# Altium PCB PCB1.PcbDoc
Units mm, origin at the board's own origin, x right, y up, seen from the top; angles counter-clockwise.
Board outline 90 x 105 mm, 2 copper layers (Top Layer, Bottom Layer), stack 0.325 mm thick; 38 components, 87 nets, 480 pads, 41 vias.
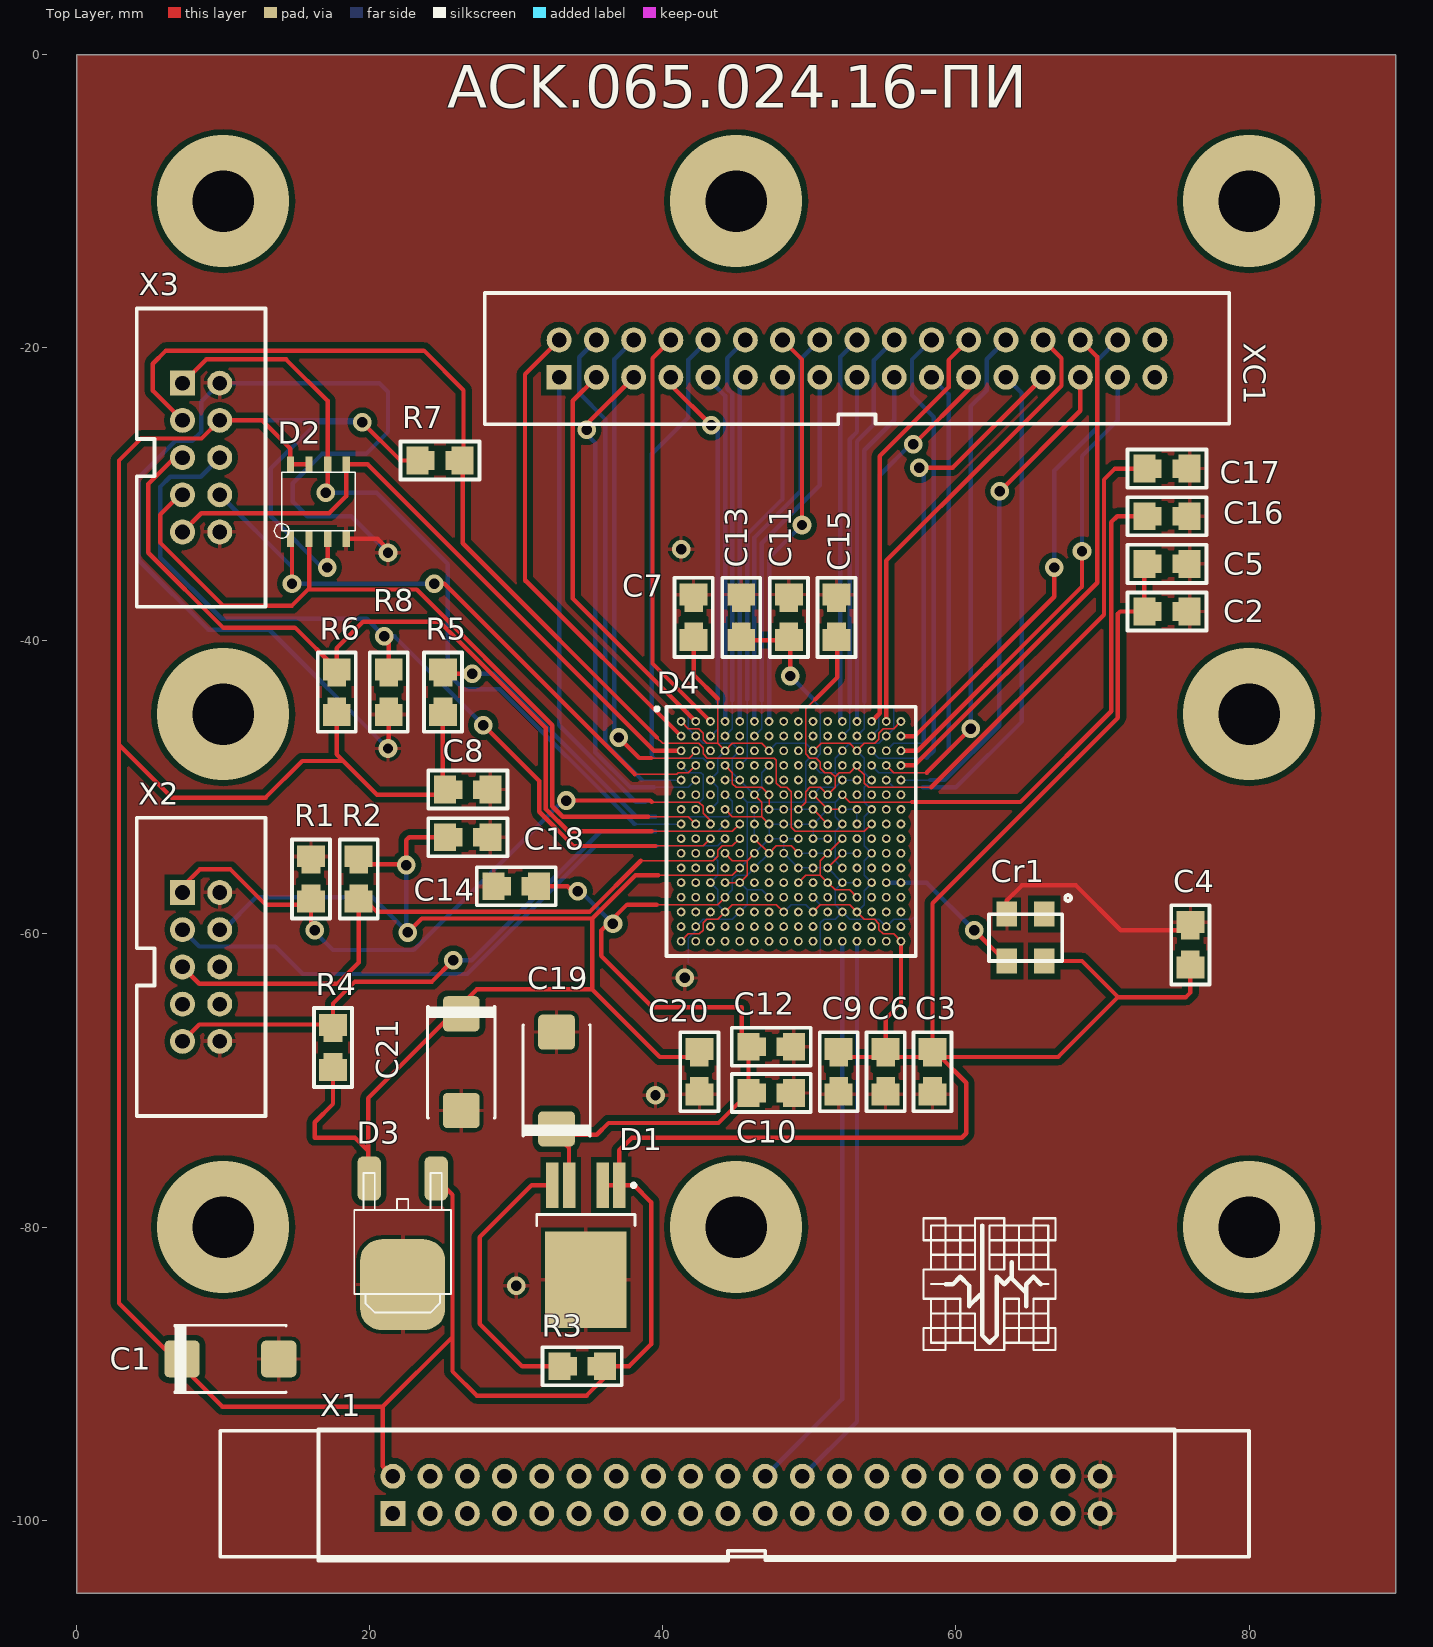
[diagram p0: Top Layer view]
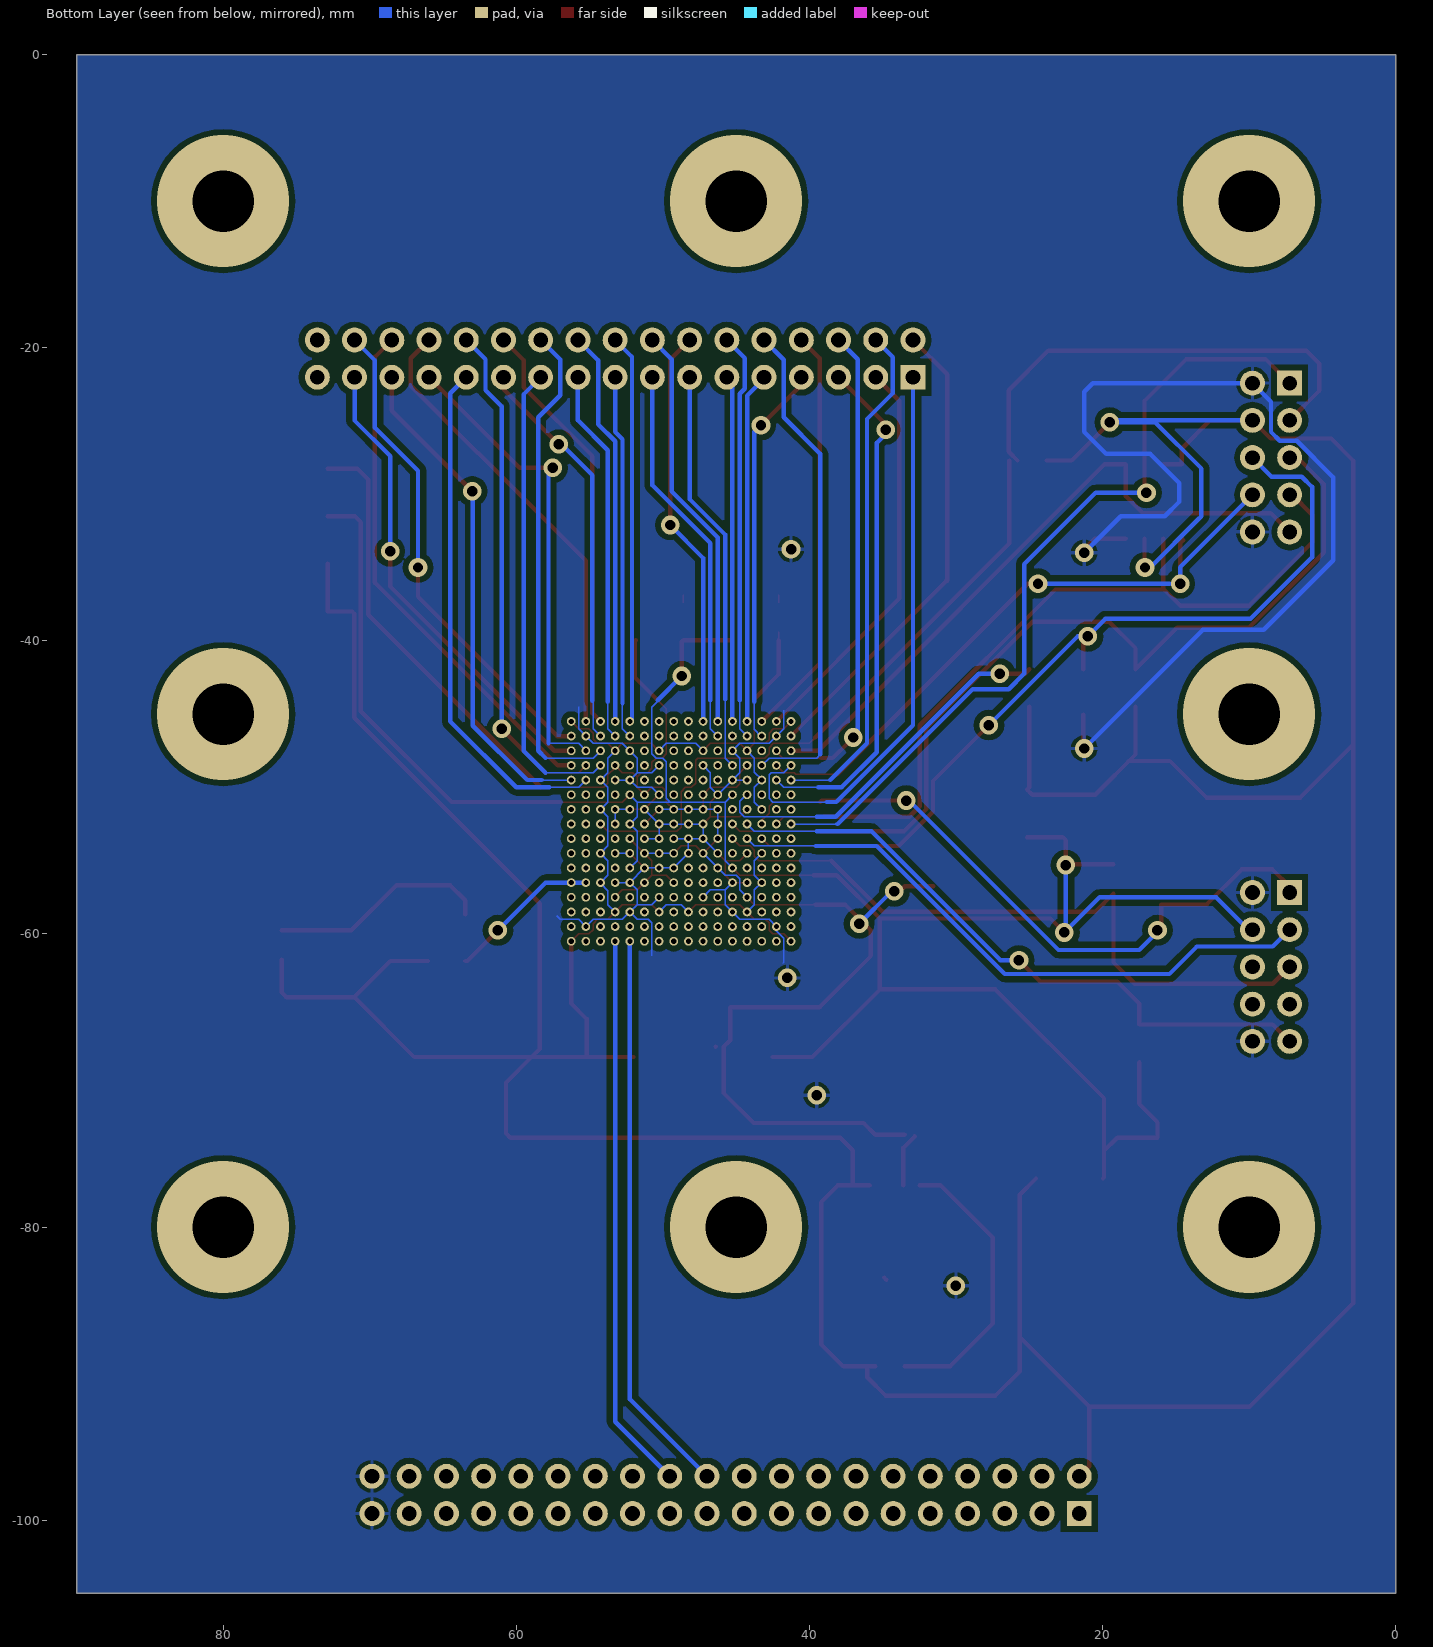
[diagram p1: Bottom Layer view, seen from below]

## Layer stack, top to bottom
Top Solder: solder mask 0.0102, Solder Resist, Dk 3.5
Top Layer: signal copper 0.0356
Dielectric 1: core 0.254, FR-4, Dk 4.2
Bottom Layer: signal copper 0.0356
Bottom Solder: solder mask 0.0102, Solder Resist, Dk 3.5

## Board outline
0,-105 90,-105 90,0 0,0

## Design rules (kind name [scope] priority, off if disabled: settings)
Clearance Clearance_1 [All] p1: gap=0.15 except(0.4: Arc-Poly Track-Poly SMDPad-Poly THPad-Poly Via-Poly Fill-Poly Poly-Poly)
Clearance Clearance_poly [InPolygon] p2: gap=0.44
HoleSize [All] p1: absolutevalues=TRUE maxlimit=5 minlimit=0.025 maxpercent=80.000 minpercent=20.000
MinimumSolderMaskSliver [All] p1 off: minsoldermaskwidth=0.254
PolygonConnect [All] p1: connectstyle=Relief reliefconductorwidth=0.254 reliefentries=4 polygonreliefangle="90 Angle" airgapwidth=0.254
RoutingVias [All] p1: holewidth=0.711 width=1.27 viastyle="Through Hole" minholewidth=0.711 minwidth=1.27 maxholewidth=0.711 maxwidth=1.27
SilkToSilkClearance [All] p1 off: silktosilkclearance=0.254
SolderMaskExpansion [All] p1: expansion=0.102
Width [All] p1: maxlimit=1 minlimit=0.1 preferedwidth=0.3 minimp=50.000000 maximp=50.000000 favimp=50.000000
27 further rules are at their usual default settings.

## Components (designator, comment, footprint, x,y, rotation, side; value= is the part's Value field where it differs from the comment)
C1 "x" "EL Case D (7343-31)" 10.5,-89 r0 top
C2 "10uF" C_0805 74.4,-38 r180 top
C3 "0.1uF" C_0805 58.4,-69.4 r90 top
C4 "0.1uF" C_0805 76,-60.75 r270 top
C5 "10uF" C_0805 74.4,-34.75 r180 top
C6 "1uF" C_0805 55.2,-69.4 r90 top
C7 "10uF" C_0805 42.1,-38.4 r270 top
C8 "10uF" C_0805 26.7,-50.15 r180 top
C9 "10uF" C_0805 52,-69.4 r90 top
C10 "10uF" C_0805 47.4,-70.85 r180 top
C11 "10uF" C_0805 48.6,-38.4 r270 top
C12 "10uF" C_0805 47.4,-67.7 r180 top
C13 "10uF" C_0805 45.35,-38.4 r270 top
C14 "10uF" C_0805 30,-56.75 r0 top
C15 "10uF" C_0805 51.85,-38.4 r270 top
C16 "10uF" C_0805 74.4,-31.5 r180 top
C17 "10uF" C_0805 74.4,-28.25 r180 top
C18 "10uF" C_0805 26.7,-53.4 r180 top
C19 "x" "EL Case D (7343-31)" 32.75,-70 r90 top
C20 "10uF" C_0805 42.5,-69.4 r90 top
C21 "x" "EL Case D (7343-31)" 26.25,-68.75 r270 top
Cr1 "quartz gen 5032" "quartz gen smd 5032" 64.75,-60.25 r180 top
D1 "NCP5661" TO114P990-5_6M 34.75,-81.25 r270 top
D2 "SOIC-8" SOIC-8 16.5,-30.5 r0 top
D3 "LM1117-3.3" TO252AA 22.25,-80.75 r180 top
D4 "Socket_1017-2-0256-0B-01" FBGA256 49.25,-53.5 r0 top
R1 "1 kOm" R_0805 16,-56.25 r270 top
R2 "10 kOm" R_0805 19.25,-56.25 r270 top
R3 "100 kOm" R_0805 34.5,-89.5 r180 top
R4 "10 kOm" R_0805 17.5,-67.75 r90 top
R5 "10 kOm" R_0805 25,-43.5 r270 top
R6 "10 kOm" R_0805 17.75,-43.5 r90 top
R7 "10 kOm" R_0805 24.8,-27.7 r180 top
R8 "10 kOm" R_0805 21.3,-43.5 r90 top
X1 "IDC-40" IDC-40 45.713,-98.275 r90 top
X2 "IDC-10" IDC-10 8.5,-62.25 r0 top
X3 "IDC-10" IDC-10 8.5,-27.5 r0 top
XC1 "IDC-34" IDC-34 53.25,-20.75 r90 top

## Footprints (in the part's own frame and the unit in brackets; to place one, negate y for a bottom-side part, rotate by r counter-clockwise, add the part's x,y. Pads: shape width x height; smd on the part's side, far side on the other; paste and mask are expansions set on the pad)
C_0805 [mm]
  rect 1.5x1.9 smd: 1(-1.55,0) 2(1.55,0)
  rect 1.27x1.27 smd: 1(-1,0) 2(1,0)
  silkscreen extent -2.7,-1.3 2.7,1.3
"EL Case D (7343-31)" [mm] "Capacitor, SM Tantalum; Body 7.3 x 4.3 mm (LxW typ)"
  rrect25% 2.4x2.5 smd: 1(-3.3,0) 2(3.3,0)
  silkscreen extent -3.8,-2.3 3.8,2.3, body extent -3.65,-2.15 3.65,2.15, height 2.81
FBGA256 [mm]
  round 0.6 hole 0.35: A1(-8,8) A2(-7,8) A3(-6,8) A4(-5,8) A5(-4,8) A6(-3,8) A7(-2,8) A8(-1,8) A9(0,8) A10(1,8) A11(2,8) A12(3,8) A13(4,8) A14(5,8) A15(6,8) A16(7,8) B1(-8,7) B2(-7,7) B3(-6,7) B4(-5,7) B5(-4,7) B6(-3,7) B7(-2,7) B8(-1,7) B9(0,7) B10(1,7) B11(2,7) B12(3,7) B13(4,7) B14(5,7) B15(6,7) B16(7,7) C1(-8,6) C2(-7,6) C3(-6,6) C4(-5,6) C5(-4,6) C6(-3,6) C7(-2,6) C8(-1,6) C9(0,6) C10(1,6) C11(2,6) C12(3,6) C13(4,6) C14(5,6) C15(6,6) C16(7,6) D1(-8,5) D2(-7,5) D3(-6,5) D4(-5,5) D5(-4,5) D6(-3,5) D7(-2,5) D8(-1,5) D9(0,5) D10(1,5) D11(2,5) D12(3,5) D13(4,5) D14(5,5) D15(6,5) D16(7,5) E1(-8,4) E2(-7,4) E3(-6,4) E4(-5,4) E5(-4,4) E6(-3,4) E7(-2,4) E8(-1,4) E9(0,4) E10(1,4) E11(2,4) E12(3,4) E13(4,4) E14(5,4) E15(6,4) E16(7,4) F1(-8,3) F2(-7,3) F3(-6,3) F4(-5,3) F5(-4,3) F6(-3,3) F7(-2,3) F8(-1,3) F9(0,3) F10(1,3) F11(2,3) F12(3,3) F13(4,3) F14(5,3) F15(6,3) F16(7,3) G1(-8,2) G2(-7,2) G3(-6,2) G4(-5,2) G5(-4,2) G6(-3,2) G7(-2,2) G8(-1,2) G9(0,2) G10(1,2) G11(2,2) G12(3,2) G13(4,2) G14(5,2) G15(6,2) G16(7,2) H1(-8,1) H2(-7,1) H3(-6,1) H4(-5,1) H5(-4,1) H6(-3,1) H7(-2,1) H8(-1,1) H9(0,1) H10(1,1) H11(2,1) H12(3,1) H13(4,1) H14(5,1) H15(6,1) H16(7,1) J1(-8,0) J2(-7,0) J3(-6,0) J4(-5,0) J5(-4,0) J6(-3,0) J7(-2,0) J8(-1,0) J9(0,0) J10(1,0) J11(2,0) J12(3,0) J13(4,0) J14(5,0) J15(6,0) J16(7,0) K1(-8,-1) K2(-7,-1) K3(-6,-1) K4(-5,-1) K5(-4,-1) K6(-3,-1) K7(-2,-1) K8(-1,-1) K9(0,-1) K10(1,-1) K11(2,-1) K12(3,-1) K13(4,-1) K14(5,-1) K15(6,-1) K16(7,-1) L1(-8,-2) L2(-7,-2) L3(-6,-2) L4(-5,-2) L5(-4,-2) L6(-3,-2) L7(-2,-2) L8(-1,-2) L9(0,-2) L10(1,-2) L11(2,-2) L12(3,-2) L13(4,-2) L14(5,-2) L15(6,-2) L16(7,-2) M1(-8,-3) M2(-7,-3) M3(-6,-3) M4(-5,-3) M5(-4,-3) M6(-3,-3) M7(-2,-3) M8(-1,-3) M9(0,-3) M10(1,-3) M11(2,-3) M12(3,-3) M13(4,-3) M14(5,-3) M15(6,-3) M16(7,-3) N1(-8,-4) N2(-7,-4) N3(-6,-4) N4(-5,-4) N5(-4,-4) N6(-3,-4) N7(-2,-4) N8(-1,-4) N9(0,-4) N10(1,-4) N11(2,-4) N12(3,-4) N13(4,-4) N14(5,-4) N15(6,-4) N16(7,-4) P1(-8,-5) P2(-7,-5) P3(-6,-5) P4(-5,-5) P5(-4,-5) P6(-3,-5) P7(-2,-5) P8(-1,-5) P9(0,-5) P10(1,-5) P11(2,-5) P12(3,-5) P13(4,-5) P14(5,-5) P15(6,-5) P16(7,-5) R1(-8,-6) R2(-7,-6) R3(-6,-6) R4(-5,-6) R5(-4,-6) R6(-3,-6) R7(-2,-6) R8(-1,-6) R9(0,-6) R10(1,-6) R11(2,-6) R12(3,-6) R13(4,-6) R14(5,-6) R15(6,-6) R16(7,-6) T1(-8,-7) T2(-7,-7) T3(-6,-7) T4(-5,-7) T5(-4,-7) T6(-3,-7) T7(-2,-7) T8(-1,-7) T9(0,-7) T10(1,-7) T11(2,-7) T12(3,-7) T13(4,-7) T14(5,-7) T15(6,-7) T16(7,-7)
  silkscreen extent -9.77,-8 8,9, body extent -9,-8 8,9, height 1.55
IDC-10 [mm]
  rect 1.7x1.7 hole 1: 1(-1.27,5.08)
  round 1.7 hole 1: 2(1.27,5.08) 3(-1.27,2.54) 4(1.27,2.54) 5(-1.27,0) 6(1.27,0) 7(-1.27,-2.54) 8(1.27,-2.54) 9(-1.27,-5.08) 10(1.27,-5.08)
  silkscreen extent -4.4,-10.18 4.4,10.17
IDC-34 [mm]
  rect 1.7x1.7 hole 1: 1(-1.27,20.32)
  round 1.7 hole 1: 2(1.27,20.32) 3(-1.27,17.78) 4(1.27,17.78) 5(-1.27,15.24) 6(1.27,15.24) 7(-1.27,12.7) 8(1.27,12.7) 9(-1.27,10.16) 10(1.27,10.16) 11(-1.27,7.62) 12(1.27,7.62) 13(-1.27,5.08) 14(1.27,5.08) 15(-1.27,2.54) 16(1.27,2.54) 17(-1.27,0) 18(1.27,0) 19(-1.27,-2.54) 20(1.27,-2.54) 21(-1.27,-5.08) 22(1.27,-5.08) 23(-1.27,-7.62) 24(1.27,-7.62) 25(-1.27,-10.16) 26(1.27,-10.16) 27(-1.27,-12.7) 28(1.27,-12.7) 29(-1.27,-15.24) 30(1.27,-15.24) 31(-1.27,-17.78) 32(1.27,-17.78) 33(-1.27,-20.32) 34(1.27,-20.32)
  silkscreen extent -4.47,-25.4 4.48,25.4
IDC-40 [mm]
  rect 1.7x1.7 hole 1: 1(-1.27,24.13)
  round 1.7 hole 1: 2(1.27,24.13) 3(-1.27,21.59) 4(1.27,21.59) 5(-1.27,19.05) 6(1.27,19.05) 7(-1.27,16.51) 8(1.27,16.51) 9(-1.27,13.97) 10(1.27,13.97) 11(-1.27,11.43) 12(1.27,11.43) 13(-1.27,8.89) 14(1.27,8.89) 15(-1.27,6.35) 16(1.27,6.35) 17(-1.27,3.81) 18(1.27,3.81) 19(-1.27,1.27) 20(1.27,1.27) 21(-1.27,-1.27) 22(1.27,-1.27) 23(-1.27,-3.81) 24(1.27,-3.81) 25(-1.27,-6.35) 26(1.27,-6.35) 27(-1.27,-8.89) 28(1.27,-8.89) 29(-1.27,-11.43) 30(1.27,-11.43) 31(-1.27,-13.97) 32(1.27,-13.97) 33(-1.27,-16.51) 34(1.27,-16.51) 35(-1.27,-19.05) 36(1.27,-19.05) 37(-1.27,-21.59) 38(1.27,-21.59) 39(-1.27,-24.13) 40(1.27,-24.13)
  silkscreen extent -4.47,-29.21 4.48,29.21
"quartz gen smd 5032" [mm]
  rect 1.4x1.7 smd: 1(-1.27,-1.6) 2(1.27,-1.6) 3(1.27,1.6) 4(-1.27,1.6)
  silkscreen extent -3.1,-2.9 2.5,1.6
R_0805 [mm]
  rect 1.5x1.9 smd: 1(-1.55,0) 2(1.55,0)
  rect 1.27x1.27 smd: 1(-1,0) 2(1,0)
  silkscreen extent -2.7,-1.3 2.7,1.3
SOIC-8 [mm]
  rect 0.5x1.1 smd: 1(-1.905,-2.54) 2(-0.635,-2.54) 3(0.635,-2.54) 4(1.905,-2.54) 5(1.905,2.54) 6(0.635,2.54) 7(-0.635,2.54) 8(-1.905,2.54)
  silkscreen extent -3,-2.5 2.5,2
TO114P990-5_6M [mm] "D-PAK, 6-Leads, Body 6.1x6.5mm, Pitch 1.14mm, Lead Span 9.9mm, IPC Low Density"
  rect 3.1x0.85 smd: 1(-4.1,2.286) 2(-4.1,1.143) 4(-4.1,-1.143) 5(-4.1,-2.286)
  rect 6.6x5.55 smd: 3(2.35,0)
  silkscreen extent -4.22,-3.35 -1.35,3.39, body extent -2.1,-3.37 4.12,3.37, height 2.39
TO252AA [mm]
  rrect50% 1.6x3 smd: 1(-2.286,-4.064) 3(2.286,-4.064)
  rrect50% 5.8x6.2 smd: 2(0,3.175)
  silkscreen extent -3.3,-4.44 3.3,5.08, body extent -3.3,-4.82 3.28,5.32, height 2.3

## Part data
C1 C19 C21: library part "EL Case D (7343-31)", "EL Tantalum Case D (7343-31)"
C2 C3 C4 C5 C6 C7 C8 C9 C10 C11 C12 C13 C14 C15 C16 C17 C18 C20: library part "capacitor 0805"
D3: library part "Volt Reg", "Voltage Regulator"
R1 R2 R3 R4 R5 R6 R7 R8: library part "resistor 0805"
X1: "разъем 2529"
X2 X3: "разъем 4130"
XC1: "разъем 6556"

## Via types
v1: diameter 1.27, hole 0.711, Top Layer to Bottom Layer, 33 vias
v2: diameter 9, hole 4.2, Top Layer to Bottom Layer, 8 vias

## Nets (pads, with @x,y where several pads share a name; then routed paths per layer and width w, separated by ;. In a path a pad name is that pad's centre, name@x,y a point inside that pad or via, vN(x,y) a via of type N, cw(c..) or ccw(c..) an arc to the next point about the centre after c; other vN are vias at no path point)
3V: C1.1 C2.2 C3.2 C4.2 C5.2 C6.2 C7.2 C8.2 C9.2 Cr1.4 D1.1 D1.2 D2.3 D2.7 D2.8 D3.1 D4.A1 D4.A16 D4.C4 D4.C7 D4.C10 D4.C13 D4.E3 D4.E14 D4.G3 D4.G14 D4.K3 D4.K14 D4.M3 D4.M14 D4.P4 D4.P8 D4.P10 D4.P13 D4.T1 D4.T16 R3.1 R5.2 R6.1 R7.2 X1.2 X3.4 | length 402.2
  Top Layer w0.1: D4.T1 41.75,-60 42.5,-60 42.75,-59.75 42.75,-59.25 43,-59 43.75,-59 D4.P4 44.75,-58 47.75,-58 D4.P8 ; D4.A1 41.75,-46 42.457,-46 42.75,-46.293 42.75,-46.75 43,-47 43.75,-47 ; C7.2@42.1,-39.95 C7.2@42.1,-39.4 ; 43.75,-43.95 43.75,-47 ; D4.C7 46.75,-47 44.75,-47 D4.C4 43.75,-47 ; D4.P10 50.75,-58 52.75,-58 D4.P13 53.75,-59 54.043,-59 54.457,-59 54.75,-59.293 54.75,-59.707 55.043,-60 55.75,-60 D4.T16 ; D4.C10 50.3,-47.5 50.8,-47 52.75,-47 D4.C13 53.75,-47 54.043,-47 54.457,-47 54.75,-46.707 54.75,-46.293 55.043,-46 55.457,-46 55.75,-46 D4.A16
  Top Layer w0.3: D2.7 D2.8 14.595,-26.895 12.66,-24.96 X3.4 8.53,-26.2 4.4,-26.2 2.9,-27.7 2.9,-47.1 ; v1(17.1,-35) 17.135,-34.965 D2.3 ; R6.1@17.75,-44.5 17.75,-45.05 17.75,-47.75 20.5,-50.5 24.8,-50.5 25.15,-50.15 25,-50 25,-45.05 R5.2@25,-44.5 ; 18.2,-48.2 15.4,-48.2 12.9,-50.7 6.5,-50.7 2.9,-47.1 ; v1(19.5,-25.1) 22.1,-27.7 23.25,-27.7 R7.2@23.8,-27.7 ; X1.2 20.9,-96.322 20.9,-92.25 ; D3.1 25.65,-77.8 25.65,-87.5 ; R3.1@35.5,-89.5 R3.1@36.05,-89.5 ; D1.2 D1.1 ; C7.2@42.1,-39.95 42.1,-42.3 43.75,-43.95 ; C9.2@52,-68.4 C6.2@55.2,-68.4 ; D4.T16 56.25,-64.75 55.2,-65.8 55.2,-67.85 C6.2@55.2,-68.4 ; Cr1.4 68.6,-61.85 71.06,-64.31 ; C5.2@72.85,-34.75 72.85,-38 71.2,-38 71.05,-38.15 71.05,-45.25 58.4,-57.9 58.4,-67.85 C3.2@58.95,-68.4 ; C4.2@76,-61.75 76,-62.3 76,-64 75.69,-64.31 71.06,-64.31 ; 2.9,-47.1 2.9,-85.2 9.95,-92.25 20.9,-92.25 ; 20.9,-92.25 25.65,-87.5 ; 25.65,-87.5 25.65,-89.85 27.3,-91.5 34.8,-91.5 36.05,-90.25 R3.1@36.05,-89.5 ; R3.1@36.05,-89.5 37.7,-89.5 39.2,-88 39.2,-78.3 38.05,-77.15 D1.1 ; D1.1 37.036,-74.764 37.9,-73.9 60.4,-73.9 60.7,-73.6 60.7,-70.15 C3.2@58.95,-68.4 ; C6.2@55.2,-68.4 58.4,-68.4 C3.2@58.95,-68.4 ; C3.2@58.95,-68.4 66.97,-68.4 71.06,-64.31
  Bottom Layer w0.1: D4.K3 43.75,-55 43.75,-56 D4.M3 43.75,-57 43.75,-58 D4.P4 ; D4.G3 43.75,-51 43.75,-50 D4.E3 43.25,-49.457 43.75,-48.957 43.75,-48 D4.C4 ; D4.C7 47.75,-47 49.75,-47 D4.C10 ; D4.P8 48.75,-58 49.75,-58 D4.P10 ; D4.P13 53.75,-58 53.75,-57.043 54.25,-56.543 D4.M14 53.75,-56 53.75,-55 D4.K14 53.75,-54 53.75,-52 D4.G14 53.75,-51 53.75,-50 D4.E14 53.75,-49 53.75,-48 D4.C13
  Bottom Layer w0.3: X3.4 19.36,-24.96 v1(19.5,-25.1) 16.4,-25.1 13.25,-28.25 13.25,-31.5 13.5,-31.75 16.75,-35 v1(17.1,-35)
5V: X1.1
+6V: X1.5
+24V: X1.3
-24V: X1.4
A2: D4.A2 XC1.3 | length 27.6
  Top Layer w0.3: XC1.3 33.865,-23.625 33.865,-37.115 D4.A2
A3: D4.A3 XC1.8 | length 28.2
  Top Layer w0.3: XC1.8 39.3,-20.73 39.3,-41.55 D4.A3
A4: D4.A4 XC1.9 | length 24
  Bottom Layer w0.3: XC1.9 43.09,-22.126 44.25,-23.286 D4.A4
A5: D4.A5 XC1.11 | length 23.6
  Bottom Layer w0.3: D4.A5 45.25,-22.4 XC1.11
A6: D4.A6 XC1.16 | length 27.9
  Bottom Layer w0.3: D4.A6 46.25,-32.95 49.4,-29.8 49.4,-20.79 XC1.16
A7: D4.A7 XC1.14 | length 27.5
  Top Layer w0.3: XC1.14 49.5,-20.81 v1(49.5,-32.1)
  Bottom Layer w0.3: D4.A7 47.25,-34.35 v1(49.5,-32.1)
A12: D4.A12 XC1.18 | length 26.6
  Bottom Layer w0.3: D4.A12 52.1,-45.35 52.1,-20.63 XC1.18
A13: D4.A13 XC1.20 | length 27.1
  Bottom Layer w0.3: D4.A13 53.25,-26.386 54.4,-25.236 54.4,-20.87 XC1.20
A14: D4.A14 XC1.24 | length 28.8
  Top Layer w0.3: D4.A14 54.8,-44.95 54.8,-27.4 59.5,-22.7 59.5,-20.85 XC1.24
A15: D4.A15 XC1.28 | length 31.5
  Top Layer w0.3: D4.A15 55.25,-34.528 62.613,-27.165 62.635,-27.165 67.2,-22.6 67.2,-20.73 XC1.28
ASDI: D2.5 D4.C1 X3.9 | length 45.3
  Top Layer w0.3: X3.9 8.51,-31.3 17.23,-31.3 18.405,-30.125 D2.5 19.86,-27.96 39.4,-47.5 D4.C1
B1: D4.B1 XC1.2 | length 32.4
  Top Layer w0.3: XC1.2 30.6,-21.81 30.6,-35.9 30.65,-35.9 D4.B1
B3: D4.B3 XC1.7 | length 26
  Top Layer w0.3: XC1.7 40.55,-22.55 v1(43.3,-25.3)
  Bottom Layer w0.1: D4.B3 43.3,-46.5 43.75,-46.05 43.75,-44.15
  Bottom Layer w0.3: v1(43.3,-25.3) 43.75,-25.75 43.75,-44.15
B4: D4.B4 XC1.12 | length 27.9
  Bottom Layer w0.1: D4.B4 44.75,-46 44.75,-44.05
  Bottom Layer w0.3: 44.75,-44.05 44.75,-23.15 44.4,-22.8 44.4,-20.71 XC1.12
B6: D4.B6 XC1.15 | length 26.3
  Bottom Layer w0.1: D4.B6 46.75,-46 46.75,-44.05
  Bottom Layer w0.3: 46.75,-44.05 46.75,-33.35 50.71,-29.39 XC1.15
B12: D4.B12 XC1.17 | length 24.9
  Bottom Layer w0.1: D4.B12 52.75,-46 52.75,-44.25
  Bottom Layer w0.3: 52.75,-44.25 52.75,-26.25 53.25,-25.75 XC1.17
B13: D4.B13 XC1.19 | length 25.5
  Bottom Layer w0.1: D4.B13 53.75,-46 53.75,-44.15
  Bottom Layer w0.3: 53.75,-44.15 53.75,-27 55.79,-24.96 XC1.19
B14: D4.B14 XC1.23 | length 27.4
  Top Layer w0.3: v1(57.1,-26.6) 60.87,-22.83 XC1.23
  Bottom Layer w0.1: D4.B14 54.75,-46 54.75,-44.05 54.8,-44.1
  Bottom Layer w0.3: 54.8,-44.1 54.8,-28.7 56.9,-26.6 v1(57.1,-26.6)
B16: D4.B16 XC1.32 | length 33.7
  Top Layer w0.3: D4.B16 57.2,-46.5 66.7,-37 v1(66.7,-35)
  Bottom Layer w0.3: v1(66.7,-35) 66.7,-28.4 69.64,-25.46 69.64,-20.87 XC1.32
C2: D4.C2 XC1.6 | length 33.9
  Top Layer w0.1: 39.2,-48 41.8,-48 42.25,-47.55 D4.C2
  Top Layer w0.3: v1(37,-46.6) 37.3,-46.9 38.4,-48 39.2,-48
  Bottom Layer w0.3: v1(37,-46.6) 36.7,-46.3 36.7,-20.79 XC1.6
C14: D4.C14 XC1.22 | length 33.9
  Bottom Layer w0.1: D4.C14 54.75,-48 58,-48
  Bottom Layer w0.3: 58,-48 58.5,-47.5 58.5,-24.75 57,-23.25 57,-20.81 XC1.22
C15: D4.C15 XC1.27 | length 32.8
  Top Layer w0.3: v1(57.5,-28.2) 59.77,-28.2 XC1.27
  Bottom Layer w0.1: D4.C15 55.75,-47 57.8,-47
  Bottom Layer w0.3: v1(57.5,-28.2) 57.7,-28.2 57.8,-28.3 57.8,-47
C16: D4.C16 XC1.31 | length 32.3
  Top Layer w0.3: D4.C16 57.4,-47.5 68.6,-36.3 v1(68.6,-33.9)
  Bottom Layer w0.3: v1(68.6,-33.9) 68.6,-27.4 71.03,-24.97 XC1.31
CONF_DONE: D4.H14 R7.1 X3.3 | length 76.9
  Top Layer w0.1: 39.6,-46.6 40,-47 42.457,-47 42.75,-47.293 42.75,-47.707 43.043,-48 47.6,-48 47.75,-48.15 47.75,-49.707 48.043,-50 48.457,-50 48.75,-50.293 48.75,-52.707 49.043,-53 53.75,-53 D4.H14
  Top Layer w0.3: X3.3 5.2,-22.93 5.2,-21.1 6.1,-20.2 23.7,-20.2 26.4,-22.9 26.4,-27.1 R7.1@25.8,-27.7 ; R7.1@26.35,-27.7 26.35,-33.35 39.6,-46.6
D1: D4.D1 XC1.1 | length 39.2
  Bottom Layer w0.1: 38.8,-51 42.5,-51 42.75,-50.75 42.75,-49.15 42.6,-49 41.75,-49 D4.D1
  Bottom Layer w0.3: XC1.1 32.93,-45.766 38.164,-51 38.8,-51
D3: D4.D3 XC1.10 | length 34.2
  Bottom Layer w0.1: 39.25,-47.75 39.5,-48 42.75,-48 D4.D3
  Bottom Layer w0.3: 39.25,-47.75 39.25,-27.25 41.75,-24.75 41.75,-20.82 XC1.10
D5: D4.D5 XC1.13 | length 27.7
  Bottom Layer w0.1: D4.D5 45.75,-48 45.75,-44
  Bottom Layer w0.3: 45.75,-44 45.75,-32.75 48.17,-30.33 XC1.13
D14: D4.D14 XC1.21 | length 32
  Bottom Layer w0.1: D4.D14 54.75,-49 58,-49
  Bottom Layer w0.3: 58,-49 59.5,-47.5 59.5,-23.19 XC1.21
D15: D4.D15 XC1.26 | length 34.7
  Top Layer w0.1: D4.D15 55.75,-49 58,-49
  Top Layer w0.3: 58,-49 v1(61,-46)
  Bottom Layer w0.3: v1(61,-46) 61,-24 62.1,-22.9 62.1,-20.79 XC1.26
D16: D4.D16 XC1.30 | length 35.6
  Top Layer w0.3: D4.D16 57.178,-48.5 69.64,-36.038 69.64,-20.63 XC1.30
DATA: D2.2 D4.H2 X3.7 | length 57.4
  Top Layer w0.1: 39,-52 41.75,-52 D4.H2
  Top Layer w0.3: X3.7 7.06,-30.04 5.7,-31.4 5.7,-33.3 10,-37.6 14.7,-37.6 15.865,-36.435 15.865,-35.2 ; D2.2 15.865,-35.2 ; 39,-52 33.178,-52 32.465,-51.287 32.465,-45.756 23.209,-36.5 15.865,-36.5 15.865,-35.2
DCLK: D2.6 D4.H1 X3.1 | length 56.1
  Top Layer w0.3: X3.1 8.85,-20.8 14.3,-20.8 17.135,-23.635 D2.6 17.135,-29.765 v1(17,-29.9)
  Bottom Layer w0.1: 38.1,-52.5 D4.H1
  Bottom Layer w0.3: v1(17,-29.9) 20.47,-29.9 25.335,-34.765 25.335,-42.235 26.4,-43.3 28.864,-43.3 38.064,-52.5 38.1,-52.5
E1: D4.E1 XC1.4 | length 34.9
  Bottom Layer w0.1: 38.578,-49.5 D4.E1
  Bottom Layer w0.3: XC1.4 34.3,-20.65 34.3,-23.1 36.065,-24.865 36.065,-46.987 38.578,-49.5
E2: D4.E2 XC1.5 | length 35.2
  Top Layer w0.3: v1(34.8,-25.6) 34.8,-25.23 XC1.5
  Bottom Layer w0.1: 39.4,-50 41.75,-50 D4.E2
  Bottom Layer w0.3: v1(34.8,-25.6) 34.8,-25.9 35.4,-26.5 35.4,-47.6 37.8,-50 39.4,-50
E15: D4.E15 XC1.25 | length 35.3
  Bottom Layer w0.1: D4.E15 55.75,-50 57.75,-50
  Bottom Layer w0.3: 57.75,-50 60,-50 64.5,-45.5 64.5,-23.11 XC1.25
E16: D4.E16 XC1.29 | length 34.3
  Top Layer w0.3: v1(63,-29.8) 68.49,-24.31 XC1.29
  Bottom Layer w0.1: D4.E16 58.25,-49.5
  Bottom Layer w0.3: 58.25,-49.5 59.25,-49.5 62.96,-45.79 62.96,-29.84 v1(63,-29.8)
GCLK0: Cr1.3 D4.M15 D4.M16 | length 10.4
  Top Layer w0.3: v1(61.25,-59.75) 63.35,-61.85 Cr1.3
  Bottom Layer w0.3: D4.M15 D4.M16 58,-56.5 v1(61.25,-59.75)
GND: C1.2 C2.1 C3.1 C4.1 C5.1 C6.1 C7.1 C8.1 C9.1 C10.1 C11.1 C12.1 C13.1 C14.1 C15.1 C16.1 C17.1 C18.1 C19.2 C20.1 C21.2 Cr1.2 D1.3 D2.4 D3.2 D4.B2 D4.B15 D4.C5 D4.C12 D4.D7 D4.D10 D4.E4 D4.E5 D4.E12 D4.E13 D4.F6 D4.F10 D4.G4 D4.G11 D4.G12 D4.G13 D4.H7 D4.H8 D4.H9 D4.H10 D4.H13 D4.J7 D4.J8 D4.J9 D4.J10 D4.J11 D4.K4 D4.K6 D4.K8 D4.K12 D4.K13 D4.L9 D4.L10 D4.L11 D4.M4 D4.M5 D4.M12 D4.M13 D4.N7 D4.N10 D4.P5 D4.P12 D4.R2 D4.R15 R1.1 R8.1 X1.39 X1.40 X2.2 X2.10 X3.2 X3.10 | length 175.8
  Top Layer w0.1: C7.1@42.1,-37.4 C7.1@42.1,-36.85 ; D4.M4 D4.M5 45.75,-56 45.75,-55 ; D4.K4 44.75,-55 45.75,-55 ; D4.G4 44.75,-52 46.75,-52 ; D4.K6 45.75,-55 ; D4.F6 46.75,-51 46.75,-52 ; D4.H7 46.75,-52 ; C11.1@48.6,-37.4 C11.1@48.6,-36.85 ; D4.F10@50.261,-50.5 D4.G11@51.25,-51.489 ; D4.L11 D4.K12 ; D4.G11 D4.G12
  Top Layer w0.3: D2.4 20.54,-33.04 21.25,-33.75 v1(21.25,-34) ; v1(21.25,-47.35) 21.3,-47.3 R8.1@21.3,-45.05 ; D1.3 D1.3@34.9,-83.45 ; Cr1.2 63.48,-57.71 64.5,-56.69 68.19,-56.69 71.25,-59.75 C4.1@76,-59.75
  Bottom Layer w0.1: 41.75,-44.75 41.75,-46 D4.B2 42.75,-47 44.75,-47 D4.C5 44.75,-48 44.75,-48.375 44.75,-49 D4.E5 D4.E4 ; 41.8,-62 41.75,-61.95 41.75,-60.293 42.25,-59.793 D4.R2 42.75,-59 43.043,-59 44.75,-59 D4.P5 45.75,-58 45.75,-57 ; D4.M5 45.75,-57 ; D4.E5@45.257,-49.5 D4.F6@46.25,-50.493 ; D4.K6 D4.J7 ; D4.F6 46.75,-50 46.75,-49 D4.D7 ; D4.N7 46.75,-57 46.457,-57 45.75,-57 ; D4.J9 D4.J8 ; D4.N10 50.75,-58 51.043,-58 51.75,-58 ; D4.F10 50.75,-50 51.75,-50 D4.E12 ; D4.D10 50.75,-49 51.75,-49 ; 50.75,-61.5 50.75,-59.25 51,-59 51.75,-59 D4.P12 ; D4.L11 D4.L10 D4.L9 D4.K8 D4.J8 ; D4.J11 D4.J10 D4.H10 ; D4.G11 D4.H10 ; D4.L11 D4.M12@52.25,-56.499 ; D4.K12 D4.K13 ; D4.G12 D4.G13 D4.H13 ; D4.M13 D4.M12 51.75,-57 51.75,-58 ; D4.E13 D4.E12 ; 55.75,-44.5 55.75,-46 D4.B15 54.75,-47 52.75,-47 D4.C12 51.75,-48 51.75,-49 ; 57.25,-58.75 57,-59 55.75,-59 D4.R15 54.75,-59 53.043,-59 52.75,-59 D4.P12 ; D4.J7 D4.J8 ; D4.J7 D4.H7 D4.H8 D4.H9 D4.H10 ; 51.75,-58 D4.P12 ; 51.75,-49 D4.E12
  Bottom Layer w0.3: v1(21.25,-47.35) 13.15,-39.25 9,-39.25 4.25,-34.5 4.25,-28.854 6.754,-26.35 7.9,-26.35 8.5,-25.75 8.5,-23.69 X3.2 20.67,-22.42 21.25,-23 21.25,-25.75 19.75,-27.25 16.75,-27.25 14.75,-29.25 14.75,-30.5 15.75,-31.5 18.75,-31.5 v1(21.25,-34)
  other v1: 30,-84 39.5,-71 41.5,-63 41.25,-33.75
GND24: X1.38
NCE: D4.J3 R8.2 X3.6 | length 58.9
  Top Layer w0.1: 39.5,-54 42.75,-54 D4.J3
  Top Layer w0.3: R8.2@21.3,-41.95 v1@21.3,-39.9 ; v1(27.75,-45.75) 31.565,-49.565 31.565,-51.66 33.905,-54 39.5,-54
  Bottom Layer w0.3: X3.6 8.47,-28.8 6.4,-28.8 5.7,-29.5 5.7,-34.3 9.9,-38.5 19.8,-38.5 v1(21,-39.7) 21.7,-39.7 v1(27.75,-45.75)
NCONFIG: D4.H5 R6.2 X3.5 | length 63
  Top Layer w0.1: 39.25,-53 44.75,-53 D4.H5
  Top Layer w0.3: X3.5 6.7,-27.5 4.9,-29.3 4.9,-34 10,-39.1 14.9,-39.1 17.75,-41.95 17.75,-40.5 19.55,-38.7 24.772,-38.7 32.015,-45.943 32.015,-51.474 33.541,-53 39.25,-53
NCS: D2.1 D4.D2 X3.8 | length 44.2
  Top Layer w0.1: 38.1,-49.1 40.943,-49.1 41.043,-49 41.75,-49 D4.D2
  Top Layer w0.3: D2.1 14.5,-33.135 14.7,-33.335 v1(14.7,-36.1) ; v1(24.4,-36.1) 25.1,-36.1 38.1,-49.1
  Bottom Layer w0.3: X3.8@9.77,-30.47 X3.8 14.7,-34.97 14.7,-35.4 v1(14.7,-36.1) ; 15.4,-36.1 v1(24.4,-36.1)
NetD1_5: D1.5 R3.2 | length 19.5
  Top Layer w0.3: D1.5 31.05,-77.15 27.5,-80.7 27.5,-86.6 30.4,-89.5 32.95,-89.5 R3.2@33.5,-89.5
NetD4_F4: D4.F4 R5.1 | length 25.5
  Top Layer w0.3: R5.1@25,-41.95 25.3,-42.25 v1(27,-42.25)
  Bottom Layer w0.1: 39.5,-52 43.5,-52 44.457,-52 44.75,-51.707 44.75,-50.95 44.3,-50.5 D4.F4
  Bottom Layer w0.3: v1(27,-42.25) 28.45,-42.25 38.2,-52 39.5,-52
PA0: X1.7
PA1: X1.9
PA2: X1.11
PA3: X1.13
PA4: X1.15
PA5: X1.17
PA6: X1.19
PA7: X1.21
PB0: X1.23
PB1: X1.25
PB2: X1.27
PB3: X1.29
PB4: X1.31
PB5: X1.33
PB6: X1.35
PB7: X1.37
PC0: X1.6
PC1: X1.8
PC2: X1.10
PC3: X1.12
PC4: X1.14
PC5: X1.16
PC6: X1.18
PC7: X1.20
PD0: D4.T12 X1.22 | length 38.7
  Bottom Layer w0.3: X1.22 52.25,-91.738 D4.T12
PD1: D4.T13 X1.24 | length 38
  Bottom Layer w0.3: X1.24 53.25,-93.278 D4.T13
PD2: X1.26
PD3: X1.28
PD4: X1.30
PD5: X1.32
PD6: X1.34
PD7: X1.36
TCK: D4.H3 R1.2 X2.1 | length 45.9
  Top Layer w0.1: 39.25,-51 41.043,-51 42.457,-51 42.75,-51.293 42.75,-51.707 42.75,-51.75 43.25,-52.25 D4.H3
  Top Layer w0.3: X2.1 7.23,-56.77 8.4,-55.6 10.5,-55.6 12.9,-58 16,-58 16,-60 v1(16.25,-59.75) ; v1(33.4,-50.9) 39.15,-50.9 39.25,-51
  Bottom Layer w0.3: v1(16.25,-59.75) 16.5,-60 16.5,-60.1 17.5,-61.1 23,-61.1 33.2,-50.9 v1(33.4,-50.9)
TDI: D4.H4 R4.2 X2.9 | length 44
  Top Layer w0.3: X2.9 8.38,-66.18 17.5,-66.18 17.5,-64.75 19,-63.25 24.25,-63.25 v1(25.7,-61.8)
  Bottom Layer w0.1: 39.5,-53 43.75,-53 D4.H4
  Bottom Layer w0.3: v1(25.7,-61.8) 26.964,-61.8 35.764,-53 39.5,-53
TDO: D4.J4 X2.3 | length 42.1
  Bottom Layer w0.1: 39.575,-54 43.75,-54 D4.J4
  Bottom Layer w0.3: X2.3 8.38,-60.86 13.56,-60.86 15.435,-62.735 26.665,-62.735 35.4,-54 39.575,-54
TMS: D4.J5 R2.2 X2.5 | length 46.6
  Top Layer w0.1: 38.5,-55 43.25,-55 43.457,-55 43.75,-54.707 43.75,-54.293 44.043,-54 44.75,-54 D4.J5
  Top Layer w0.3: X2.5 8.38,-63.4 17.8,-63.4 19.25,-61.95 19.25,-57.8 19.25,-57.25 20.5,-58.5 35,-58.5 38.5,-55
VCCA: C11.2 C13.2 C16.2 C18.2 C20.2 C21.1 D3.3 D4.F5 D4.F12 D4.H12 D4.L5 D4.L12 R2.1 R4.1 X2.4 | length 169.3
  Top Layer w0.1: 39.7,-56 44.457,-56 44.75,-56 D4.L5 ; C13.2@45.35,-39.95 C13.2@45.35,-39.4 ; D4.F12 52.75,-51 57,-51
  Top Layer w0.3: R4.1@17.5,-68.75 17.5,-69.3 17.5,-71.6 16.25,-72.85 16.25,-73.9 19,-73.9 19.9,-74.8 ; R2.1@19.25,-55.25 v1@22.5,-55.25 ; D3.3 19.9,-76.622 19.9,-74.8 ; v1(22.5,-55.3) v1@22.5,-55.25 ; v1(22.6,-59.9) 23.55,-58.95 35.186,-58.95 ; C18.2@25.15,-53.4 22.7,-53.4 22.5,-53.6 v1@22.5,-55.25 ; 39.7,-56 38.136,-56 35.186,-58.95 ; C20.2@42.5,-68.4 39.8,-68.4 35.186,-63.786 ; C13.2@45.35,-39.95 48.6,-39.95 48.7,-40.05 v1(48.7,-42.4) ; 57,-51 64.4,-51 70.6,-44.8 70.6,-31.9 71,-31.5 C16.2@72.85,-31.5 ; 19.9,-74.8 19.9,-71.2 27.314,-63.786 35.186,-63.786 ; 35.186,-63.786 35.186,-58.95
  Bottom Layer w0.1: D4.L5 45.75,-55 45.75,-51 ; D4.F5 45.75,-51 ; 50.2,-44 50.75,-44.55 50.75,-47.707 50.457,-48 49.993,-48 49.75,-48.243 49.75,-50.75 49.5,-51 ; D4.L12 51.75,-55 51.75,-53 D4.H12 51.75,-52 51.75,-51 ; D4.F12 51.75,-51 ; 45.75,-51 49.5,-51 ; 49.5,-51 51.75,-51
  Bottom Layer w0.3: X2.4 10.04,-59.71 12.25,-57.5 20.2,-57.5 v1@22.5,-59.8 ; v1(22.5,-55.3) v1@22.5,-59.8 ; v1(22.6,-59.9) v1@22.5,-59.8 ; v1(48.7,-42.4) 50.35,-44.05
VCCINT: C10.2 C12.2 C14.2 C15.2 C17.2 C19.1 D1.4 D4.D4 D4.D13 D4.F7 D4.F11 D4.G6 D4.G7 D4.G8 D4.G9 D4.G10 D4.H6 D4.H11 D4.J6 D4.J12 D4.K7 D4.K9 D4.K10 D4.K11 D4.L6 D4.M9 D4.M11 D4.N4 D4.N13 | length 135.8
  Top Layer w0.1: 39.6,-58 43.75,-58 D4.N4 ; D4.D4 44.75,-49 44.75,-49.75 45,-50 46.75,-50 D4.F7 D4.G7 ; D4.J6 D4.K7 47.75,-54 48.75,-54 D4.K9 ; D4.M9 49.75,-56 50.75,-56 ; D4.G9 49.75,-51 49.75,-50.729 49.75,-50.293 50.043,-50 50.5,-50 50.75,-50 D4.F11 51.75,-50 51.75,-49.707 51.75,-49.293 ; D4.G10 D4.H11 ; 50.4,-44 49.75,-44.65 49.75,-47.707 50.043,-48 50.457,-48 50.75,-48.293 50.75,-48.707 51.043,-49 51.457,-49 51.75,-49.293 ; D4.J12 D4.K11 50.75,-55 50.75,-56 ; D4.N13 52.75,-57 52.043,-57 51.75,-57 D4.M11 50.75,-56 ; 58.322,-50 54.043,-50 53.75,-49.707 53.75,-49.15 53.25,-48.65 D4.D13 52.75,-49 52.043,-49 51.75,-49.293
  Top Layer w0.3: C14.2@31.55,-56.75 33.5,-56.75 33.85,-57.1 v1(34.2,-57.1) ; C19.1@32.8,-73.8 33.6,-74.6 33.6,-77.143 D1.4 ; C19.1@33.5,-73.7 35.5,-73.7 36.3,-72.9 43.8,-72.9 45.85,-70.85 45.85,-67.7 45.4,-67.25 45.4,-65 39.3,-65 35.8,-61.5 35.8,-59.764 37.564,-58 39.6,-58 ; 50.4,-44 51.9,-42.5 51.9,-40 C15.2@51.85,-39.95 ; 58.322,-50 70.1,-38.222 70.1,-29 70.85,-28.25 C17.2@72.85,-28.25
  Bottom Layer w0.1: D4.N4 44.75,-57 44.75,-56.25 45,-56 45.75,-56 D4.L6 D4.K7 ; D4.J6 D4.H6 D4.G6 D4.G7 D4.G8 D4.G9 D4.G10 ; D4.K9 D4.K10 D4.K11
  Bottom Layer w0.3: v1(34.2,-57.1) 34.4,-57.1 v1(36.6,-59.3)
pads on no net: Cr1.1 D4.A8 D4.A9 D4.A10 D4.A11 D4.B5 D4.B7 D4.B8 D4.B9 D4.B10 D4.B11 D4.C3 D4.C6 D4.C8 D4.C9 D4.C11 D4.D6 D4.D8 D4.D9 D4.D11 D4.D12 D4.E6 D4.E7 D4.E8 D4.E9 D4.E10 D4.E11 D4.F1 D4.F2 D4.F3 D4.F8 D4.F9 D4.F13 D4.F14 D4.F15 D4.F16 D4.G1 D4.G2 D4.G5 D4.G15 D4.G16 D4.H15 D4.H16 D4.J1 D4.J2 D4.J13 D4.J14 D4.J15 D4.J16 D4.K1 D4.K2 D4.K5 D4.K15 D4.K16 D4.L1 D4.L2 D4.L3 D4.L4 D4.L7 D4.L8 D4.L13 D4.L14 D4.L15 D4.L16 D4.M1 D4.M2 D4.M6 D4.M7 D4.M8 D4.M10 D4.N1 D4.N2 D4.N3 D4.N5 D4.N6 D4.N8 D4.N9 D4.N11 D4.N12 D4.N14 D4.N15 D4.N16 D4.P1 D4.P2 D4.P3 D4.P6 D4.P7 D4.P9 D4.P11 D4.P14 D4.P15 D4.P16 D4.R1 D4.R3 D4.R4 D4.R5 D4.R6 D4.R7 D4.R8 D4.R9 D4.R10 D4.R11 D4.R12 D4.R13 D4.R14 D4.R16 D4.T2 D4.T3 D4.T4 D4.T5 D4.T6 D4.T7 D4.T8 D4.T9 D4.T10 D4.T11 D4.T14 D4.T15 X2.6 X2.7 X2.8 XC1.33 XC1.34
copper on no net:
  other v2: 10,-80 45,-80 80,-80 10,-45 80,-45 10,-10 45,-10 80,-10

## Polygon pours and split planes (outlines as drawn)
GND on Top Layer "Top Layer-No Net" (solid, pour order 2): 0,0 90,0 90,-105 0,-105
GND on Bottom Layer "Top Layer-No Net" (solid, pour order 4): 0,0 90,0 90,-105 0,-105

## Other copper
Top Layer:
  region net VCCINT: 50.5,-50 50.75,-50

## Silkscreen, mask and mechanical layers (free items; w line width, h text height)
Top Overlay:
  lines w0.15: 58.296,-83.894 59.296,-83.894 ; 61.296,-86.894 59.296,-86.894 ; 61.296,-81.894 59.296,-81.894 ; 61.296,-80.894 59.296,-80.894 ; 62.296,-81.894 63.296,-81.894 ; 63.296,-86.894 66.296,-86.894 66.796,-86.894 66.796,-88.394 65.296,-88.394 65.296,-87.894 65.296,-85.894 ; 63.296,-85.894 66.296,-85.894 ; 64.296,-87.894 64.296,-85.894 ; 64.296,-79.894 64.296,-82.894 66.296,-82.894 ; 65.296,-82.894 65.296,-79.894 ; 65.796,-83.894 66.296,-83.894 ; 66.296,-81.894 64.296,-81.894 ; 58.296,-86.894 58.296,-87.894 59.296,-87.894 ; 58.296,-86.894 59.296,-86.894 ; 58.296,-86.894 58.296,-85.894 ; 58.296,-86.894 57.796,-86.894 57.796,-88.394 59.296,-88.394 59.296,-87.894 ; 58.296,-85.894 58.296,-84.894 ; 58.296,-85.894 59.296,-85.894 ; 58.296,-84.894 59.296,-84.894 ; 58.296,-84.894 57.796,-84.894 57.796,-82.894 58.296,-82.894 ; 58.296,-82.894 58.296,-81.894 ; 58.296,-82.894 59.296,-82.894 ; 58.296,-81.894 58.296,-80.894 ; 58.296,-81.894 59.296,-81.894 ; 58.296,-80.894 59.296,-80.894 ; 58.296,-80.894 58.296,-79.894 59.296,-79.894 ; 58.296,-80.894 57.796,-80.894 57.796,-79.394 59.296,-79.394 59.296,-79.894 ; 59.296,-87.894 60.296,-87.894 ; 59.296,-87.894 59.296,-86.894 ; 59.296,-86.894 59.296,-85.894 ; 59.296,-85.894 61.296,-85.894 61.296,-87.894 ; 59.296,-85.894 59.296,-84.894 ; 59.296,-84.894 60.296,-84.894 60.296,-87.894 ; 59.296,-82.894 59.296,-81.894 ; 59.296,-82.894 60.296,-82.894 ; 59.296,-81.894 59.296,-80.894 ; 59.296,-80.894 59.296,-79.894 ; 59.296,-79.894 60.296,-79.894 ; 60.296,-87.894 61.296,-87.894 ; 60.296,-82.894 60.296,-79.894 ; 60.296,-82.894 61.296,-82.894 61.296,-79.894 ; 60.296,-79.894 61.296,-79.894 ; 61.296,-87.894 61.296,-88.394 62.796,-88.394 63.296,-88.394 63.296,-87.894 ; 61.296,-79.894 61.296,-79.394 63.296,-79.394 63.296,-79.894 ; 62.296,-80.894 62.296,-79.894 63.296,-79.894 ; 62.296,-80.894 66.296,-80.894 66.796,-80.894 66.796,-79.394 65.296,-79.394 65.296,-79.894 ; 62.296,-80.894 62.296,-82.894 63.296,-82.894 63.296,-79.894 ; 63.296,-87.894 63.296,-84.894 64.296,-84.894 64.296,-85.894 ; 63.296,-87.894 66.296,-87.894 66.296,-84.894 ; 63.296,-81.894 64.296,-81.894 ; 63.296,-81.894 64.296,-81.894 ; 63.296,-79.894 65.296,-79.894 ; 64.296,-85.894 65.296,-85.894 ; 65.296,-85.894 65.296,-84.894 66.296,-84.894 ; 65.296,-79.894 66.296,-79.894 66.296,-82.894 ; 66.296,-84.894 66.796,-84.894 66.796,-82.894 66.296,-82.894
  lines w0.254: 9.8,-102.5 80,-102.5 80,-93.9 9.8,-93.9 9.8,-102.5
  lines w0.3: 59.296,-83.894 59.796,-83.894 60.296,-83.394 ; 61.796,-79.894 61.796,-84.494 ; 63.796,-83.294 63.796,-83.494 64.796,-84.494 ; 63.796,-82.694 63.796,-82.394 ; 63.796,-82.494 63.796,-83.394 63.296,-83.894 62.996,-83.594 62.796,-83.394 62.796,-87.394 62.296,-87.894 61.796,-87.394 61.796,-84.494 ; 64.796,-85.394 64.796,-83.894 65.296,-83.394 65.796,-83.894 ; 60.296,-83.394 60.296,-83.394 ; 60.296,-83.394 60.896,-83.994 60.896,-85.394 61.596,-84.694 61.796,-84.494
  text "ACK.065.024.16-ПИ" at 25.3,-4.6 h5
Mechanical 1:
  the board outline again, w1